# Altium PCB Driver_MOSFET_DC_Input.PcbDoc
Units mil, origin at the board's own origin, x right, y up, seen from the top; angles counter-clockwise.
Board outline 1970 x 745.04 mil, 2 copper layers (Top Layer, Bottom Layer); 25 components, 18 nets, 68 pads, 13 vias.
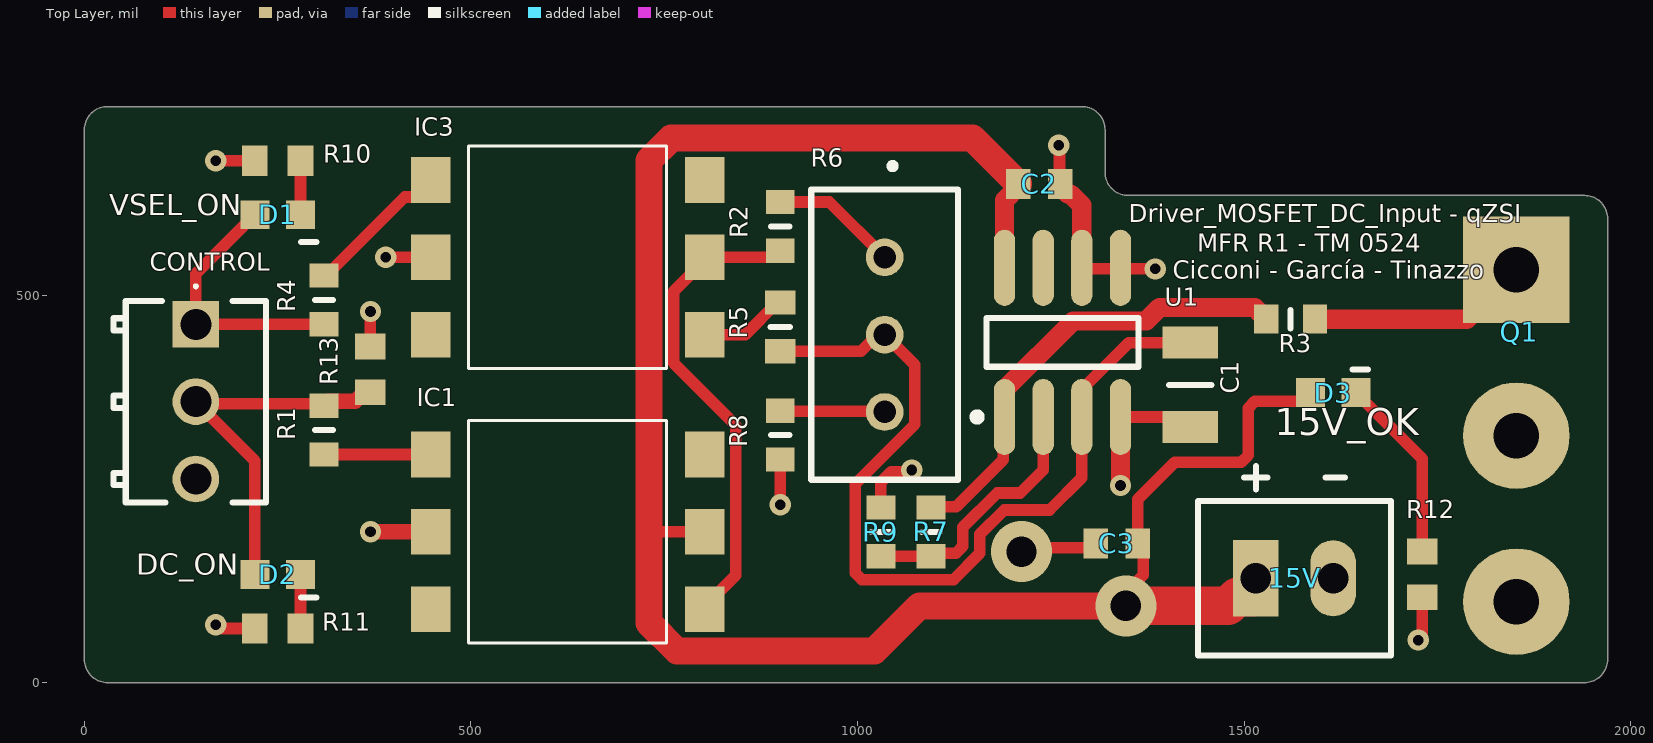
[diagram p0: Top Layer view]
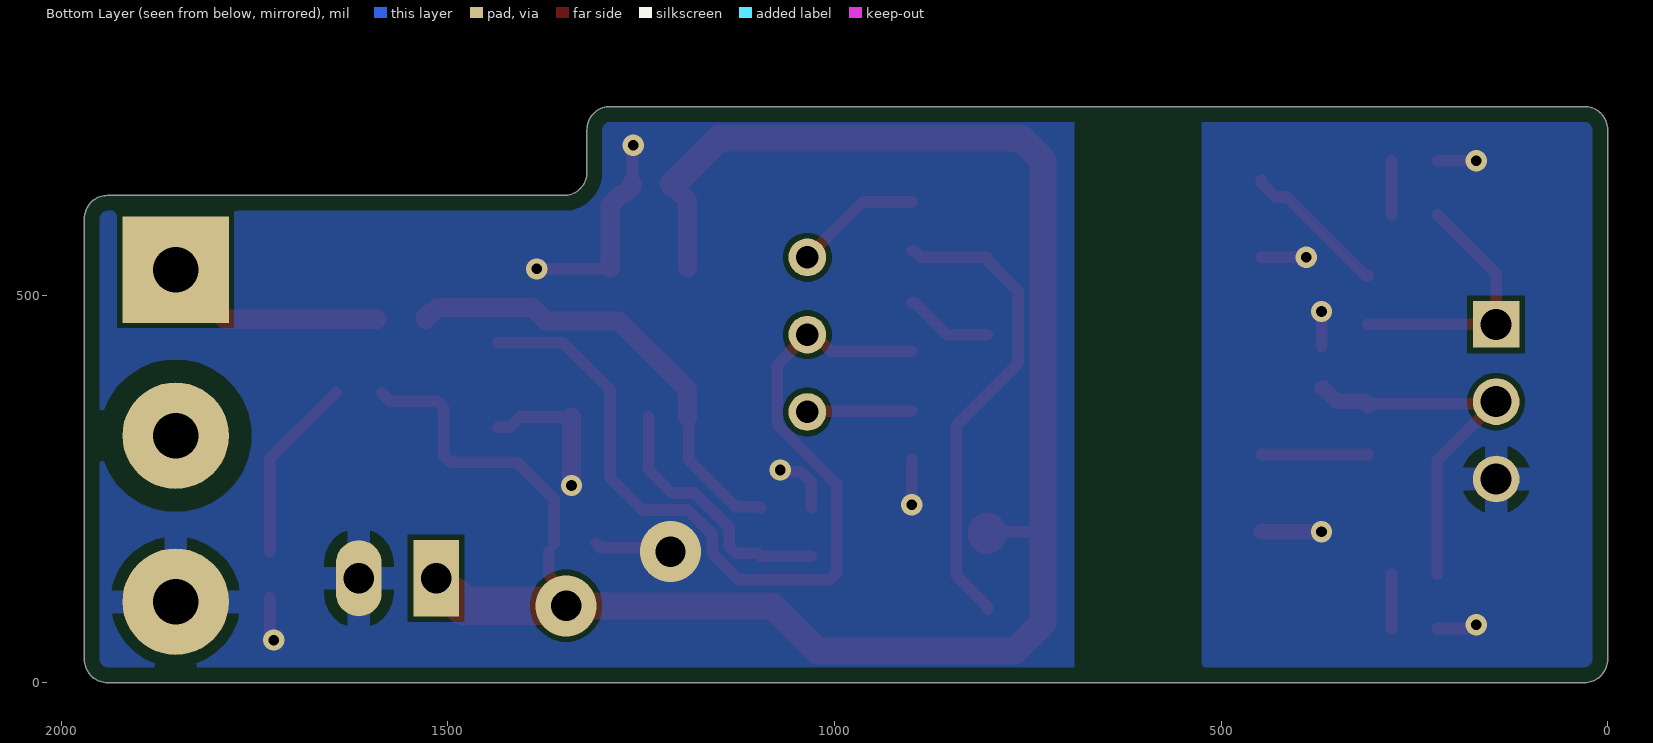
[diagram p1: Bottom Layer view, seen from below]
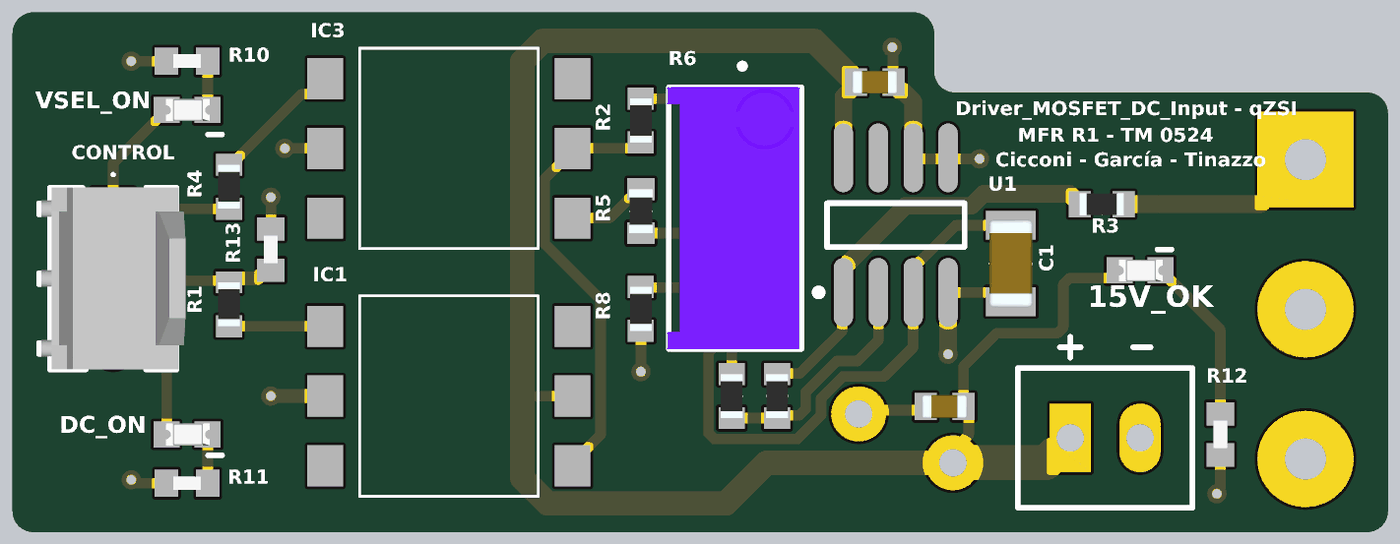
[diagram p2: 3D render of the assembled board from above, using the file's embedded part models]

## Layer stack, top to bottom
Top Solder: solder mask 0.4, Solder Resist, Dk 3.5
Top Layer: signal copper 1.4
Dielectric 1: dielectric 12.6, FR-4, Dk 4.8
Bottom Layer: signal copper 1.4
Bottom Solder: solder mask 0.4, Solder Resist, Dk 3.5

## Board outline
0,30 0,715 cw(c30,715) 30,745 1290,745 cw(c1290,715) 1320,715 1320,660 ccw(c1350,660) 1350,630 1940,630 cw(c1940,600) 1970,600 1970,30 cw(c1940,30) 1940,0 1940,-0.04 30,-0.04 30,0 cw(c30,30)

## Design rules (kind name [scope] priority, off if disabled: settings)
BoardOutlineClearance [All] p1: gap=19.68 ignorepadtopadclearanceinfootprint=FALSE
Clearance [All] p1: gap=7 ignorepadtopadclearanceinfootprint=TRUE
ComponentClearance [All] p1: gap=0 collisioncheckmode=3 verticalgap=100000 showdistances=FALSE
MinimumSolderMaskSliver [All] p1: minsoldermaskwidth=5
PlaneClearance [All] p1: clearance=35
PlaneConnect [All] p1: planeconnectstyle=Relief reliefexpansion=20 reliefentries=4 reliefconductorwidth=20 reliefairgap=10
PolygonConnect [All] p1: thpad.connectstyle=Relief thpad.reliefconductorwidth=30 thpad.reliefentries=4 thpad.polygonreliefangle="90 Angle" thpad.airgapwidth=15 smdpad.connectstyle=Relief smdpad.reliefconductorwidth=30 smdpad.reliefentries=4 smdpad.polygonreliefangle="90 Angle" smdpad.airgapwidth=15 via.connectstyle=Direct via.reliefconductorwidth=10 via.reliefentries=4 via.polygonreliefangle="90 Angle" via.airgapwidth=10
RoutingVias [All] p1: holewidth=13.78 width=27.56 viastyle="Through Hole" minholewidth=13.78 minwidth=27.56 maxholewidth=39.37 maxwidth=78.74
SilkToSilkClearance [All] p1: silktosilkclearance=5
SilkToSolderMaskClearance [IsPad] p1: minsilkscreentomaskgap=5 clearancetoexposedcopper=TRUE
SolderMaskExpansion [All] p1: expansion=4 istentingtop=FALSE
Width [All] p1: maxlimit=100 minlimit=10 preferedwidth=15 minimp=50.000000 maximp=50.000000 favimp=50.000000
24 further rules are at their usual default settings.

## Components (designator, comment, footprint, x,y, rotation, side; value= is the part's Value field where it differs from the comment)
15V "WF-4" HDR1X2 1515,135 r0 top
C1 "1u 50V 1206" CAPC3216X180N 1430,385 r90 top value=1u
C2 "100n" CAPC1608X95N 1235,645 r0 top
C3 "100n" CAPC1608X95N 1335,180 r180 top
CONTROL "76384-303LF" 76384303LF 144.17,463.27 r270 top
D1 "VSEL_ON" LEDC1608X80N 250,605 r180 top
D2 "DC_ON" LEDC1608X80N 250,140 r180 top
D3 "15V_OK" LEDC1608X80N 1615,375 r180 top
IC1 "4N35S" 4N35S 625,195 r270 top
IC3 "4N35S" 4N35S 625,550 r270 top
Q1 "IPx65R110CFD" "TO-247 Horiz. Heatsink" 1851.93,319.33 r270 top locked
R1 "1k" RESC1608X55N#1 310,326.5 r270 top
R2 "Res1" RESC1608X55N#1 900,590 r90 top value=47k
R3 "Res1" RESC1608X55N#1 1560,470 r0 top value=220R
R4 "1k" RESC1608X55N#1 310,495 r90 top
R5 "Res1" RESC1608X55N#2 900,460 r270 top value=1k
R6 "10k" 3296W-1 1035,450 r270 top value=5k
R7 "Res1" RESC1608X55N#1 1095,195 r90 top value=10k
R8 "Res1" RESC1608X55N#1 900,320 r270 top value=1k
R9 "Res1" RESC1608X55N#1 1030,195 r90 top value=10k
R10 "CRCW06032K20FKEA" RESC1608X50N 250,675 r0 top value=2k2
R11 "CRCW06032K20FKEA" RESC1608X50N 250,70 r0 top value=2k2
R12 "CRCW060310K0FKEA" RESC1608X50N 1730,140 r90 top value=10k
R13 "CRCW060310K0FKEA" RESC1608X50N 370,405 r270 top value=10k
U1 "LM358D" 751-07_M 1265,440 r90 top

## Footprints (in the part's own frame and the unit in brackets; to place one, negate y for a bottom-side part, rotate by r counter-clockwise, add the part's x,y. Pads: shape width x height; smd on the part's side, far side on the other; paste and mask are expansions set on the pad)
4N35S [mm]
  rect 1.5x1.3 smd: 1(-2.54,-4.5) 2(0,-4.5) 3(2.54,-4.5) 4(2.54,4.5) 5(0,4.5) 6(-2.54,4.5)
  silkscreen extent -3.65,-3.25 3.65,3.25
751-07_M [mm] "SOIC, 8-Leads, Body 4.9x3.9mm, Pitch 1.27mm, IPC Low Density"
  oval 2.5x0.7 smd: 1(-2.45,1.905) 2(-2.45,0.635) 3(-2.45,-0.635) 4(-2.45,-1.905) 5(2.45,-1.905) 6(2.45,-0.635) 7(2.45,0.635) 8(2.45,1.905)
  silkscreen extent -2.57,-2.5 0.8,2.93, body extent -2,-2.5 2,2.5, height 1.75
3296W-1 [mm]
  round 1.24 hole 0.74: 1(-2.54,0) 2(0,0) 3(2.54,0)
  silkscreen extent -5.64,-2.41 4.76,2.41, body extent -4.78,-2.48 4.78,2.35, height 11.55
76384303LF [mm]
  rect 1.53x1.53 hole 1.02: 1(0,0)
  round 1.53 hole 1.02: 2(2.54,0) 3(5.08,0)
  silkscreen extent -1.3,-2.7 5.85,2.3, body extent -0.78,-2.62 5.84,2.63, height 9.47
CAPC1608X95N [mm]
  rect 0.81x0.99 smd: 1(-0.69,0) 2(0.69,0)
  body extent -0.82,-0.43 0.82,0.43, height 0.95
CAPC3216X180N [mm]
  rect 1.05x1.82 smd: 1(-1.39,0) 2(1.39,0)
  silkscreen extent 0,-0.7 0,0.7, body extent -1.6,-0.8 1.6,0.8, height 1.8
HDR1X2 [mm] "Connector; Header; 2 Position; Pitch 2.54mm"
  rect 1.5x2.5 hole 1: 1(0,0)
  oval 1.5x2.5 hole 1: 2(2.54,0)
  silkscreen extent -1.9,-2.54 4.45,2.54
LEDC1608X80N [mm]
  rect 0.95x0.95 smd: 1(-0.75,0) 2(0.75,0)
  body extent -0.83,-0.4 0.77,0.4, height 0.7
RESC1608X50N [mm]
  rect 0.85x1 smd: 1(-0.75,0) 2(0.75,0)
  body extent -0.5,-0.25 0.5,0.25, height 0.35
RESC1608X55N#1 [mm]
  rect 0.8x0.95 smd: 1(-0.8,0) 2(0.8,0)
  silkscreen extent 0,-0.3 0,0.3, body extent -0.8,-0.4 0.8,0.4, height 0.55
RESC1608X55N#2 [mm]
  rect 0.8x1 smd: 1(-0.8,0) 2(0.8,0)
  silkscreen extent 0,-0.33 0,0.33, body extent -0.8,-0.43 0.8,0.43, height 0.55
"TO-247 Horiz. Heatsink" [mm] "TO, Thru-Hole, Horizontal, Heatsink Mounted; 3 In-Line Leads; Pitch 5.45 mm"
  round 0 all layers, no hole: 0(-12.264,0.186)
  rect 3.5x3.5 hole 1.5: 1(-5.45,0)
  round 3.5 hole 1.5: 2(0,0) 3(5.45,0)

## Part data
15V: library part MHDR1X2, "Header, 2-Pin", LatestRevisionDate=17-Jul-2002, LatestRevisionNote="Re-released for DXP Platform.", Publisher="Altium Limited", System=Connector
C1: library part C3216X7R1H105K160AE, "Capacitor", Manufacturer_Name=TDK, Mouser Part Number=810-C3216X7R1H105KST, Arrow Part Number=C3216X7R1H105K160AE, Arrow Price/Stock=https://www.arrow.com/en/products/c3216x7r1h105k160ae/tdk?region=nac, Datasheet Link=https://product.tdk.com/info/en/catalog/datasheets/mlcc_commercial_midvoltage_en.pdf, Height=1.8mm, Manufacturer_Part_Number=C3216X7R1H105K160AE, Mouser Price/Stock=https://www.mouser.co.uk/ProductDetail/TDK/C3216X7R1H105K160AE?qs=LcTL%2F5vFEzHWgMW0Em18fQ%3D%3D
C2 C3: library part EMK107B7104KA-T, "Capacitor", Manufacturer_Name="TAIYO YUDEN", Mouser Part Number=963-EMK107B7104KA-T, Arrow Part Number=EMK107B7104KA-T, Arrow Price/Stock=https://www.arrow.com/en/products/emk107b7104ka-t/taiyo-yuden, Datasheet Link=http://www.farnell.com/datasheets/746258.pdf, Height=0.95mm, Manufacturer_Part_Number=EMK107B7104KA-T, Mouser Price/Stock=https://www.mouser.co.uk/ProductDetail/Taiyo-Yuden/EMK107B7104KA-T?qs=I6KAKw0tg2ybqzX8hKPgfw%3D%3D
CONTROL: "Connector", Manufacturer_Name="Amphenol Communications Solutions", Mouser Part Number=649-76384-303LF, Datasheet Link=https://cdn.amphenol-cs.com/media/wysiwyg/files/drawing/76384.pdf, Height=9.49mm, Manufacturer_Part_Number=76384-303LF
D1 D2 D3: library part 150060GS75000, "LED", Manufacturer_Name="Wurth Elektronik", Mouser Part Number=710-150060GS75000, Datasheet Link=https://componentsearchengine.com/Datasheets/2/150060GS75000.pdf, Height=0.8mm, Manufacturer_Part_Number=150060GS75000, Mouser Price/Stock=https://www.mouser.co.uk/ProductDetail/Wurth-Elektronik/150060GS75000?qs=LlUlMxKIyB0UYkq5lDO8nA%3D%3D
IC1 IC3: "Integrated Circuit", Manufacturer_Name=Lite-On, Datasheet Link=http://optoelectronics.liteon.com/upload/download/DS-70-99-0012/4N3X%20Series%201115.pdf, Height=4.6mm, Manufacturer_Part_Number=4N35S
Q1: "Infineon Power MOSFET N-Channel 650V 31.2A", ComponentLink1Description="Manufacturer Link", ComponentLink1URL=http://www.irf.com/, ComponentLink2Description=Datasheet, ComponentLink2URL=http://www.irf.com/product-info/datasheets/data/IRHN7150.pdf, DatasheetVersion=13-Jul-2001, PackageDescription="SM; 3 Leadless Terminals; Body 10.28 x 7.64 x 3.06 mm (LxWxH)", PackageReference=SMD-0.5, PackageVersion=16-Sep-2002, Published=17-Sep-2003, Publisher="Altium Limited"
R1 R4: library part RMC16K102FTP, "Resistor", Manufacturer_Name=Kamaya, Datasheet Link=https://www.mouser.jp/datasheet/2/210/kamaya_products_RMC__english_20170424_100617-1524908.pdf, Height=0.55mm, Manufacturer_Part_Number=RMC16K102FTP
R2 R3 R5 R7 R8 R9: "Resistor", LatestRevisionDate=17-Jul-2002, LatestRevisionNote="Re-released for DXP Platform.", PackageDescription="Axial Device, Thru-Hole; 2 Leads; 0.3 in Pin Spacing", PackageReference=AXIAL-0.3, Published=8-Jun-2000, Publisher="Altium Limited"
R6: library part 3296W-1-502LF, "Resistor", Manufacturer_Name=Bourns, Mouser Part Number=652-3296W-1-502LF, Arrow Part Number=3296W-1-502LF, Arrow Price/Stock=https://www.arrow.com/en/products/3296w-1-502lf/bourns?region=europe, Datasheet Link=https://componentsearchengine.com/Datasheets/2/3296W-1-502LF.pdf, Manufacturer_Part_Number=3296W-1-502LF, Mouser Price/Stock=https://www.mouser.co.uk/ProductDetail/Bourns/3296W-1-502LF?qs=zl1BDXJPZVrTnesl5BcuCQ%3D%3D
R10 R11: "Resistor", Manufacturer_Name=Vishay, Mouser Part Number=71-CRCW0603-2.2K-E3, Arrow Part Number=CRCW06032K20FKEA, Arrow Price/Stock=https://www.arrow.com/en/products/crcw06032k20fkea/vishay?region=nac, Datasheet Link=http://www.vishay.com/docs/20035/dcrcwe3.pdf, Height=0.5mm, Manufacturer_Part_Number=CRCW06032K20FKEA, Mouser Price/Stock=https://www.mouser.co.uk/ProductDetail/Vishay-Dale/CRCW06032K20FKEA?qs=wckIcdUuIXiMEbhHncbunA%3D%3D
R12 R13: "Resistor", Manufacturer_Name=Vishay, Mouser Part Number=71-CRCW0603-10K-E3, Arrow Part Number=CRCW060310K0FKEA, Arrow Price/Stock=https://www.arrow.com/en/products/crcw060310k0fkea/vishay?region=nac, Datasheet Link=http://www.vishay.com/docs/20035/dcrcwe3.pdf, Height=0.5mm, Manufacturer_Part_Number=CRCW060310K0FKEA, Mouser Price/Stock=https://www.mouser.co.uk/ProductDetail/Vishay-Dale/CRCW060310K0FKEA?qs=pAO1Z172M84BVnhDjtnsoQ%3D%3D
U1: "Dual Operational Amplifier", Code_IPC=SOIC127P600-8, ComponentLink1Description="Manufacturer Link", ComponentLink1URL=http://www.ti.com/, ComponentLink2Description=Datasheet, ComponentLink2URL=http://www-s.ti.com/sc/ds/lm358.pdf, DatasheetVersion=Jul-1998, LatestRevisionDate=13-Apr-2006, LatestRevisionNote="IPC-7351 Footprint Added.", PackageDescription="8-Pin Small Outline Integrated Circuit 1.27 mm Pitch", PackageReference=D008, PackageVersion=Jan-1998, Published=16-Jan-2001, Publisher="Altium Limited"

## Via types
v1: diameter 27.56, hole 13.78, Top Layer to Bottom Layer, tented top, 11 vias
v2: diameter 78.74, hole 39.37, Top Layer to Bottom Layer, 2 vias

## Nets (pads, with @x,y where several pads share a name; then routed paths per layer and width w, separated by ;. In a path a pad name is that pad's centre, name@x,y a point inside that pad or via, vN(x,y) a via of type N, cw(c..) or ccw(c..) an arc to the next point about the centre after c; other vN are vias at no path point)
"+15 V": 15V.1 C2.1 C3.1 D3.2 IC1.5 U1.8 | length 2609.2
  Top Layer w15: 730.07,190 735.07,195 IC1.5 ; v2(1346.93,99.33) 1346.93,116.58 1369.55,139.2 C3.1@1369.55,169.07 ; C3.1 1362.17,237.17 1410,285 1496.21,285 1505,293.79 1505,355.01 1513.79,363.8 1574.27,363.8 D3.2
  Top Layer w25: U1.8 1190,623.62 1207.83,641.46 C2.1
  Top Layer w35: C2.1 1207.83,645.43 1206.28,646.99 1205.85,646.99 1148.81,704.03 759.03,704.03 730.07,675.07 730.07,190 730.07,77.32 766.43,40.97 1021.58,40.97 1079.94,99.33 v2(1346.93,99.33)
  Top Layer w50: IC1.5@802.17,191.06 IC1.5 ; v2(1346.93,99.33) 1479.33,99.33 1490.79,110.79 1510.47,110.79 1515,115.32 15V.1
DC_IN_SW: CONTROL.2 D2.2 R1.1 R13.2 | length 488.5
  Top Layer w15: CONTROL.2 CONTROL.2@146.81,360.63 ; D2.2 220.47,286.97 CONTROL.2@146.81,360.63 ; R1.1@307.36,360.63 CONTROL.2@146.81,360.63
  Top Layer w20: R1.1@307.36,360.63 R1.1 315.75,363.74 350.31,363.74 367.05,380.47 R13.2@370,380.47
DGND: CONTROL.3 IC1.2 IC3.2 R10.1 R11.1 R13.1 | length 284.2
  Top Layer w15: v1(170,75) 173.4,75 178.4,70 R11.1 ; v1(170,675) R10.1 ; R13.1 v1(370,480) ; v1(390,550) IC3.2
  Top Layer w20: v1(370,195) IC1.2
GND: 15V.2 C1.1 C2.2 C3.2 Q1.3 R8.2 R9.2 R12.1 U1.4 U1.5 U1.6 | length 753.1
  Top Layer w15: v1(900,230) R8.2 ; R9.2 1030,258.89 1043.71,272.6 1067.6,272.6 v1(1070,275) ; v2(1211.93,169.33) 1217.26,174.67 1302.5,174.67 C3.2 ; v1(1260,695) 1261.08,693.92 1261.08,646.08 C2.2 ; U1.6 1291.46,535 v1(1385,535) ; U1.4 1406.57,343.54 1419.84,330.28 C1.1@1435,330.28 ; v1(1725,55) 1725,58.4 1730,63.4 R12.1
  Top Layer w25: C2.2 1262.17,641.46 1271.81,631.81 1275.36,631.81 1290,617.17 U1.6 ; v1(1340,255) U1.4
NetC1_2: C1.2 R5.2 R6.2 U1.3 | length 1150
  Top Layer w15: R5.2 1004.35,428.5 1025.85,450 R6.2 1073.91,411.09 1073.91,333.88 1035.37,295.34 ; 1035.34,295.34 996.8,256.8 996.8,141.75 1005.29,133.26 1124.14,133.26 1158.06,167.17 1158.06,191.64 1189.62,223.2 1248.2,223.2 1290,265 1290,378.98 1350.75,439.72 C1.2@1435,439.72
NetD1_1: D1.1 R10.2 | length 70
  Top Layer w15: D1.1 R10.2
NetD2_1: D2.1 R11.2 | length 70
  Top Layer w15: R11.2 D2.1
NetD3_1: D3.1 R12.2 | length 240.9
  Top Layer w15: D3.1 1730,289.53 R12.2
NetIC1_1: IC1.1 R1.2 | length 137.8
  Top Layer w15: R1.2 IC1.1
NetIC1_4: IC1.4 IC3.5 R2.1 | length 622.8
  Top Layer w15: IC1.4 802.17,98.94 842.26,139.03 842.26,332.74 762.07,412.93 762.07,505.97 802.17,546.06 IC3.5 888.54,550 897.05,558.5 R2.1
NetIC3_1: IC3.1 R4.2 | length 191.3
  Top Layer w15: R4.2 312.95,526.5 414.43,627.97 429.74,627.97 447.83,646.06 IC3.1
NetIC3_4: IC3.4 R5.1 | length 115
  Top Layer w15: IC3.4 854.57,450 896.06,491.5 R5.1
NetQ1_1: Q1.1 R3.2 | length 286.9
  Top Layer w25: R3.2 1788.03,470 Q1.1
NetR2_2: R2.2 R6.1 | length 164.6
  Top Layer w15: R2.2 963.5,621.5 R6.1
NetR3_1: R3.1 R7.2 U1.1 | length 600.6
  Top Layer w15: R7.2 1095.92,227.41 1127.41,227.41 1188.4,288.4 1188.4,341.94 U1.1
  Top Layer w25: U1.1 1190,378.98 1278.77,467.74 1373.11,467.74 1390.36,485 1513.5,485 1522.3,476.2 1525.26,476.2 1528.5,472.95 R3.1
NetR6_3: R6.3 R8.1 | length 135.6
  Top Layer w15: R8.1 900.75,350.75 1034.25,350.75 R6.3
NetR7_1: R7.1 R9.1 U1.2 | length 339.1
  Top Layer w15: R9.1 R7.1 1099,167.5 1127.27,167.5 1136.06,176.29 1136.06,200.76 1180.5,245.2 1210.2,245.2 1240,275 U1.2
VSEL: CONTROL.1 D1.2 R4.1 | length 339.3
  Top Layer w15: D1.2 144.17,528.7 CONTROL.1 144.41,463.5 R4.1
pads on no net: IC1.3 IC1.6 IC3.3 IC3.6 Q1.0 Q1.2 U1.7

## Polygon pours and split planes (outlines as drawn)
GND on Bottom Layer "NONET_L-01_P-001" (solid, pour order 1): 1970,630 1970,220 1970,0 690,0 690,745 1330,745 1330,630
DGND on Bottom Layer "NONET_L-01_P-001" (solid, remove dead copper, pour order 0): 0,745 525,745 525,0 0,0

## Other copper
Bottom Layer:
  pour cut-out: 1753.5,319.33 ccw(c1851.93,319.33) 1851.93,220.91 ccw(c1851.93,319.33) 1950.35,319.33 ccw(c1851.93,319.33) 1851.93,417.76 ccw(c1851.93,319.33)

## Silkscreen, mask and mechanical layers (free items; w line width, h text height)
Top Overlay:
  lines w7.87: 280,110 300,110 ; 280,570 300,570 ; 1500,265 1530,265 ; 1515,250 1515,260 1515,280 ; 1605,265 1630,265 ; 1640,405 1660,405
  text "Driver_MOSFET_DC_Input - qZSI" at 1350.34,587.83 h39.37
  text "MFR R1 - TM 0524" at 1439.48,549.64 h39.37
  text "Cicconi - García - Tinazzo" at 1407.61,514.3 h39.37
Mechanical 13:
  lines w7.87: 0,30 ccw(c30,30) 30,0 1940,-0.04 ccw(c1940,30) 1970,30 1970,600 ccw(c1940,600) 1940,630 1350,630 cw(c1350,660) 1320,660 1320,715 ccw(c1290,715) 1290,745 30,745 ccw(c30,715) 0,715 0,30